# Altium PCB PCB_IR_Encoder_v2.PcbDoc
Units mm, origin at the board's own origin, x right, y up, seen from the top; angles counter-clockwise.
Board outline 10.06 x 6.39 mm, 2 copper layers (Top Layer, Bottom Layer); 6 components, 6 nets, 20 pads, 6 vias.
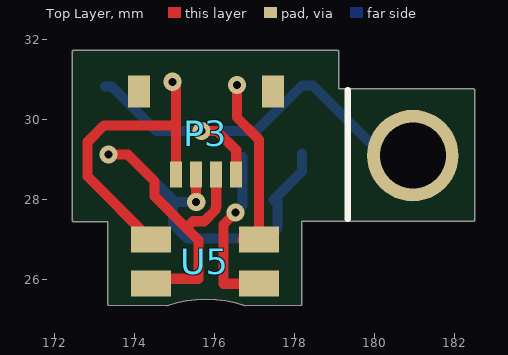
[diagram p0: Top Layer view]
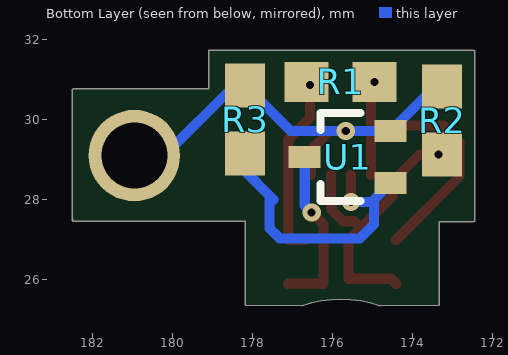
[diagram p1: Bottom Layer view, seen from below]

## Layer stack, top to bottom
Top Solder: solder mask 0.0102, Solder Resist, Dk 3.5
Top Layer: signal copper 0.0356
Dielectric 1: dielectric 0.32, FR-4, Dk 4.8
Bottom Layer: signal copper 0.0356
Bottom Solder: solder mask 0.0102, Solder Resist, Dk 3.5

## Board outline
174.804,25.344 ccw(c174.805,25.37) 174.813,25.345 cw(c175.776,22.534) 176.755,25.34 ccw(c176.764,25.364) 176.764,25.338 178.151,25.349 ccw(c178.151,25.375) 178.177,25.375 178.178,27.457 182.474,27.457 ccw(c182.474,27.483) 182.5,27.483 ccw(c182.474,27.483) 182.492,27.502 ccw(c182.474,27.521) 182.5,27.521 182.5,30.734 ccw(c182.474,30.734) 182.474,30.76 179.096,30.76 179.096,31.699 ccw(c179.07,31.699) 179.07,31.725 172.466,31.725 ccw(c172.466,31.699) 172.44,31.699 172.44,27.47 ccw(c172.466,27.47) 172.466,27.444 173.329,27.444 173.329,25.375 ccw(c173.355,25.375) 173.355,25.349

## Design rules (kind name [scope] priority, off if disabled: settings)
Clearance [All] p1: gap=0.127 ignorepadtopadclearanceinfootprint=FALSE except(0: Arc-Hole Track-Hole SMDPad-Hole THPad-Hole Via-Hole Fill-Hole Poly-Hole Region-Hole Text-Hole; 0.152: Track-THPad SMDPad-SMDPad)
PolygonConnect [All] p1: connectstyle=Relief reliefconductorwidth=0.254 reliefentries=4 polygonreliefangle="90 Angle" airgapwidth=0.254
RoutingVias [All] p1: holewidth=0.711 width=0.203 viastyle="Through Hole" minholewidth=0.203 minwidth=0.457 maxholewidth=0.711 maxwidth=1.27
SolderMaskExpansion [All] p1: expansion=0.102
Width [All] p1: maxlimit=0.254 minlimit=0.152 preferedwidth=0.254
30 further rules are at their usual default settings.

## Components (designator, comment, footprint, x,y, rotation, side; value= is the part's Value field where it differs from the comment)
P3 "FH33J-4S-0.5SH(99)" FH33J-4S-0.5SH(99) 175.793,25.476 r270 top
R1 "100" 0603W 175.818,30.937 r180 bottom
R2 "10K" 0603W 173.253,29.997 r270 bottom
R3 "10K" 0603W 178.181,30.023 r270 bottom
U1 "MOSFET N CHANNEL" SOT323 175.616,29.058 r0 bottom
U5 "GP2S60" GP2S60 175.768,26.441 r0 top

## Footprints (in the part's own frame and the unit in brackets; to place one, negate y for a bottom-side part, rotate by r counter-clockwise, add the part's x,y. Pads: shape width x height; smd on the part's side, far side on the other; paste and mask are expansions set on the pad)
0603W [mm]
  rect 1.1x1 smd: 1(-0.825,0) 2(0.875,0)
  body extent -0.77,-0.4 0.83,0.4, height 0.8
FH33J-4S-0.5SH(99) [mm]
  rect 0.65x0.3 smd mask+0.05: 1(-3.141,0.743) 2(-3.141,0.242) 3(-3.141,-0.259) 4(-3.14,-0.758)
  rect 0.8x0.55 smd mask+0.05: 5(-5.223,1.661) 6(-5.224,-1.686)
  body extent -6.16,-2.01 -3.16,1.99, height 1.2
GP2S60 [mm]
  rect 1x0.65 smd: 1(-1.366,0.549) 2(-1.366,-0.551) 3(1.336,-0.551) 4(1.335,0.549)
  body extent -1.6,-0.85 1.6,0.85, height 1.1
SOT323 [mm] "Smaller package for SOT23"
  rect 0.8x0.55 smd: 1(-1.075,0.65) 2(-1.075,-0.65) 3(1.075,0)
  silkscreen extent -0.33,-1.1 0.67,1.1, body extent -0.67,-1.1 0.67,1.1, height 1.1

## Part data
P3: "0.5mm FPC connector"
R1 R2 R3: library part Resistor

## Free pads (board coordinates)
  round 2.286 hole 1.65: 1(180.95,29.095)

## Via types
v1: diameter 0.457, hole 0.203, Top Layer to Bottom Layer, tented both sides, 6 vias

## Nets (pads, with @x,y where several pads share a name; then routed paths per layer and width w, separated by ;. In a path a pad name is that pad's centre, name@x,y a point inside that pad or via, vN(x,y) a via of type N, cw(c..) or ccw(c..) an arc to the next point about the centre after c; other vN are vias at no path point)
ENC_OUT: P3.2 R2.2 U5.2 | length 7.4
  Top Layer w0.254: v1(173.344,29.122) 173.824,29.122 174.498,28.448 174.498,28.078 175.291,27.285 ; U5.2 174.527,26.015 175.156,26.015 175.595,26.015 175.595,26.981 175.291,27.285 ; P3.2 176.036,27.813 176.017,27.794 176.017,27.735 175.734,27.453 175.458,27.453 175.291,27.285
GND: P3.1 pad.1 R2.1 R3.1 U1.2 | length 11
  Top Layer w0.254: v1(175.666,29.708) 176.058,29.708 176.536,29.229 P3.1
  Bottom Layer w0.254: R2.1 173.426,30.822 U1.2 v1(175.666,29.708) 177.041,29.708 R3.1 178.448,30.848 180.201,29.095 pad.1
IR_SEND: P3.3 R3.2 U1.1 | length 7.6
  Top Layer w0.254: v1(175.535,27.935) P3.3
  Bottom Layer w0.254: U1.1 174.957,27.991 ; v1(175.535,27.935) 175.013,27.935 174.957,27.991 ; 177.47,27.991 177.571,28.092 ; R3.2 178.181,28.702 177.571,28.092 ; 174.957,27.991 174.957,27.379 175.311,27.026 177.317,27.026 177.571,27.28 177.571,28.092
NetR1_1: R1.1 U5.4 | length 4.5
  Top Layer w0.254: v1(176.555,30.861) 176.555,30.048 177.103,29.5 U5.4 U5.4@176.692,26.99
NetU1_3: U1.3 U5.3 | length 4.2
  Top Layer w0.254: v1(176.518,27.671) 176.218,27.37 176.218,25.89 U5.3
  Bottom Layer w0.254: v1(176.518,27.671) 176.691,27.843 U1.3
VCC: P3.4 R1.2 U5.1 | length 7.8
  Top Layer w0.254: U5.1 172.822,28.57 172.822,29.439 173.228,29.845 175.035,29.845 ; v1(174.943,30.937) 175.035,30.845 175.035,29.845 ; P3.4 175.035,29.845
pads on no net: P3.5 P3.6

## Silkscreen, mask and mechanical layers (free items; w line width, h text height)
Top Overlay:
  lines w0.152: 179.324,27.508 179.324,30.734
Mechanical 1:
  circle w0.006: c175.773,22.534 r0.003
  lines w0.051: 179.07,30.709 179.07,31.699 175.768,31.699 172.466,31.699 172.466,27.47 173.354,27.47 173.355,25.375 174.805,25.37 cw(c175.776,22.534) 176.764,25.364 178.151,25.375 178.152,27.483 182.474,27.483 ; 179.07,30.734 182.474,30.734 182.474,27.52
  text "10mm x 6.5 mm" at 181.991,34.315 h0.76
  text "0.4 mm thick, black soldermask" at 181.839,33.071 h0.76
Mechanical 13:
  circle w0.2: c165.633,24.638 r0.543
  circle w0.013: c175.789,22.582 r4.7
  circle w0.013: c175.773,22.534 r1.6
  circle w0.051: c175.776,22.534 r3
  lines w0.013: 175.773,24.985 cw(c175.773,22.534) 176.408,24.901 ; 175.773,24.985 cw(c175.773,22.534) 176.408,24.901 ; 175.773,24.985 175.773,27.162 ; 175.773,24.985 175.773,27.162 ; 175.773,27.162 cw(c175.773,22.534) 176.971,27.005 ; 175.773,27.162 cw(c175.773,22.534) 176.971,27.005 ; 176.408,24.901 176.971,27.005 ; 176.408,24.901 176.971,27.005 ; 171.136,22.549 cw(c175.765,22.549) 171.294,23.747 173.397,23.184 ccw(c175.765,22.549) 173.314,22.549 171.136,22.549 ; 171.288,21.351 ccw(c175.759,22.549) 171.75,20.235 173.636,21.324 cw(c175.759,22.549) 173.391,21.915 171.288,21.351 ; 171.762,24.86 cw(c175.77,22.546) 172.498,25.819 174.037,24.279 ccw(c175.77,22.546) 173.648,23.771 171.762,24.86 ; 172.48,19.274 ccw(c175.753,22.546) 173.439,18.538 174.528,20.424 cw(c175.753,22.546) 174.02,20.813 172.48,19.274 ; 173.459,26.549 cw(c175.773,22.54) 174.575,27.011 175.139,24.908 ccw(c175.773,22.54) 174.548,24.663 173.459,26.549 ; 174.552,18.07 ccw(c175.75,22.541) 175.75,17.912 175.75,20.09 cw(c175.75,22.541) 175.115,20.173 174.552,18.07 ; 176.384,20.167 ccw(c175.75,22.535) 176.975,20.412 178.064,18.526 cw(c175.75,22.535) 176.947,18.064 176.384,20.167 ; 176.995,24.651 cw(c175.77,22.528) 177.503,24.262 179.043,25.801 ccw(c175.77,22.528) 178.084,26.537 176.995,24.651 ; 177.486,20.796 ccw(c175.752,22.529) 177.875,21.304 179.761,20.215 cw(c175.752,22.529) 179.025,19.256 177.486,20.796 ; 177.887,23.751 cw(c175.764,22.526) 178.132,23.16 180.235,23.723 ccw(c175.764,22.526) 179.773,24.84 177.887,23.751 ; 178.125,21.891 ccw(c175.758,22.526) 178.209,22.526 180.386,22.526 cw(c175.758,22.526) 180.229,21.328 178.125,21.891
  lines w0.2: 165.684,23.393 165.684,24.054 ; 165.176,22.504 166.141,22.479 166.141,23.368 165.176,23.368 165.176,22.504
  text "Circle goes up" at 160.706,25.933 h0.76
Mechanical 15:
  circle w0.051: c180.95,29.095 r1.4
  lines w0.25: 178.943,25.121 179.654,24.409 179.73,24.409
  lines w0.5: 172.517,27.254 173.126,27.254 173.076,27.203 173.076,25.197 173.177,25.095 178.41,25.095 178.435,25.121 178.435,27.28 178.46,27.254 179.273,27.254
  text "No tabs here (Needs to be press fitted)" at 176.403,23.317 h0.76